# EAGLE board manvnode2 (EAGLE 5.09)
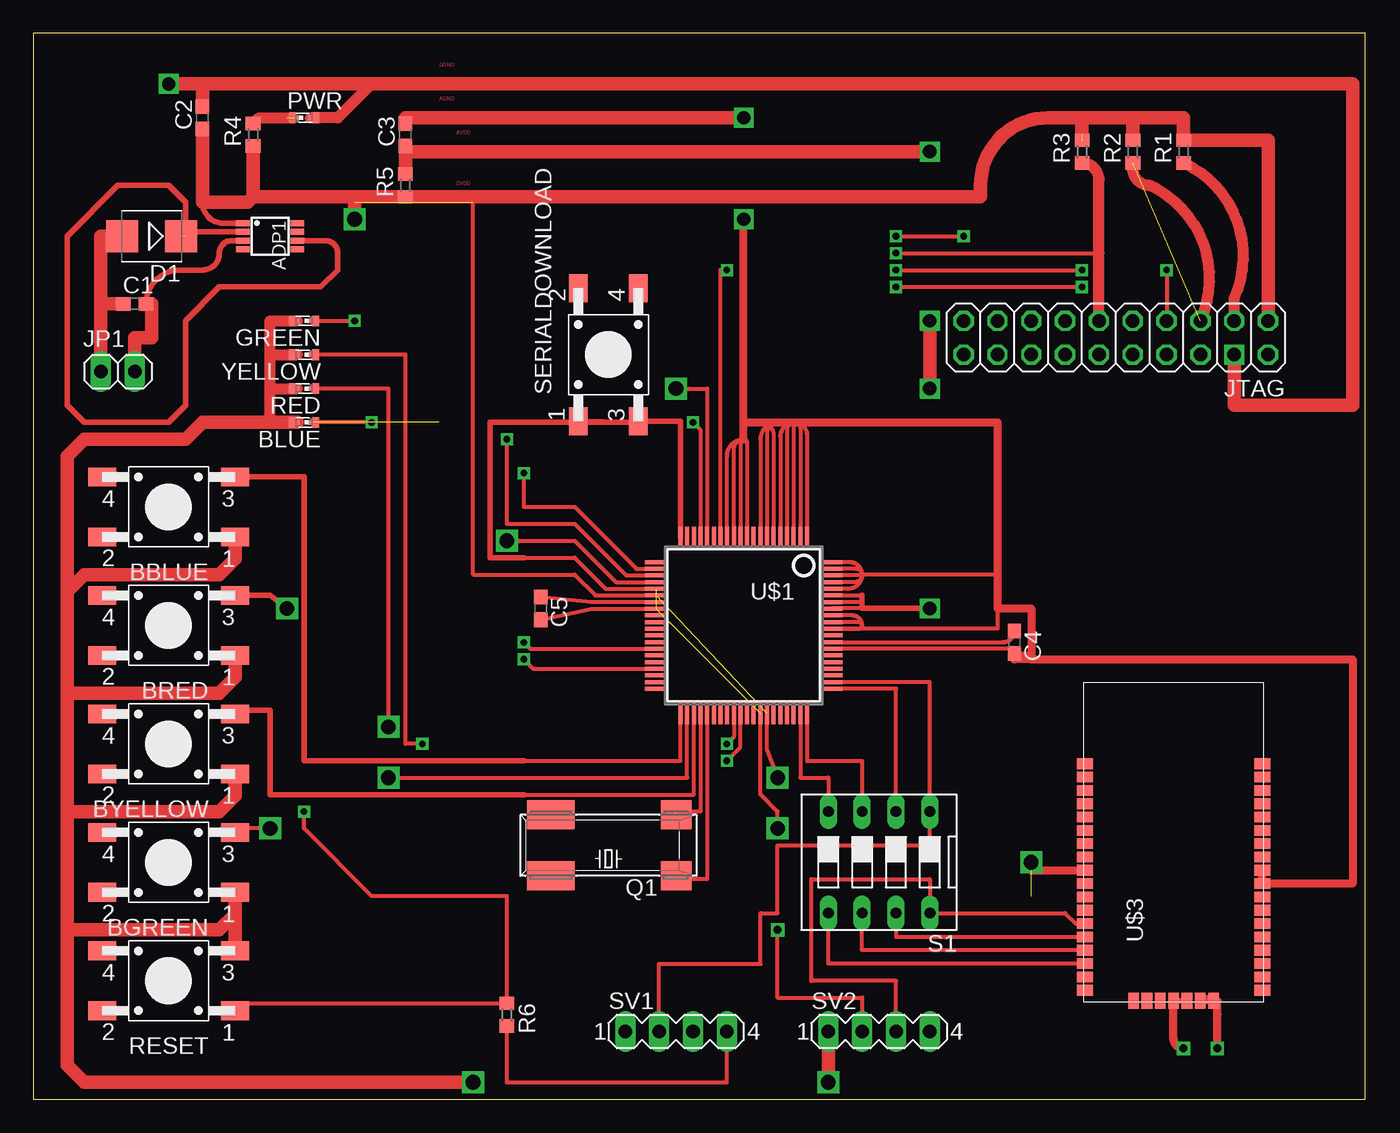
[diagram p0: board, top side]
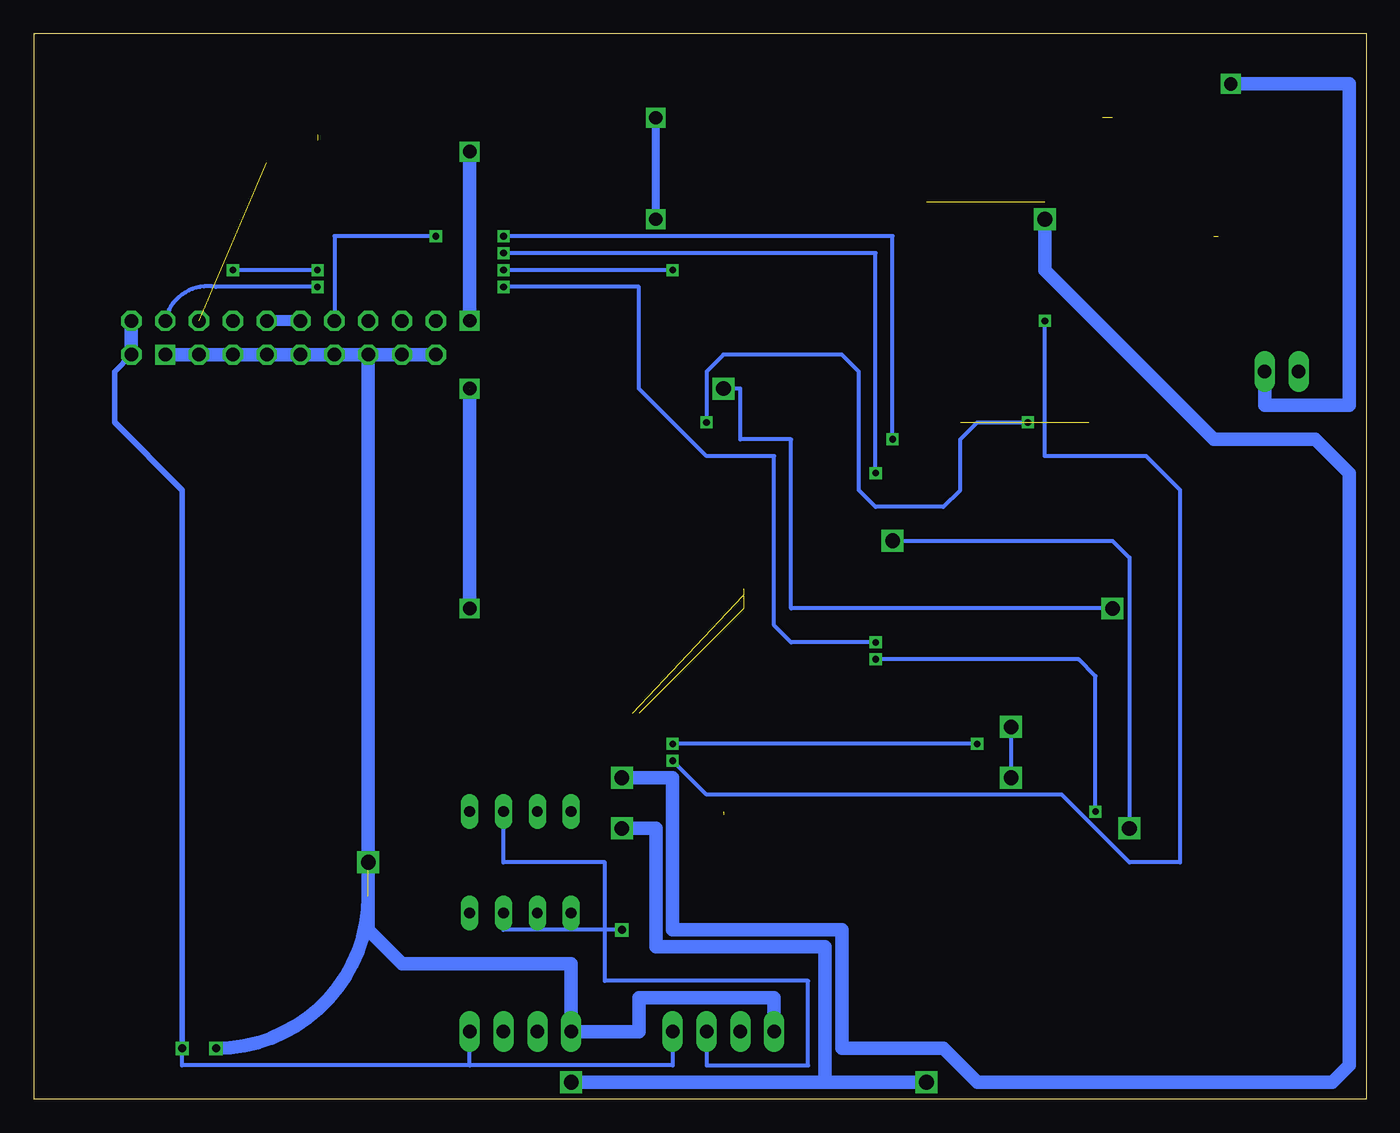
[diagram p1: board, bottom side, seen from below]

Size 100 x 80 mm. Coordinates in mm from the lower left corner, seen from the top.
Outline: 0,0 100,0 100,80 0,80 0,0
Copper layers (1*16): Top 0.035mm / dielectric 1.5mm / Bottom 0.035mm
Design rules "default": minimum track width 10mil, minimum drill 24mil, track to track 8mil, track to pad 8mil, pad to pad 8mil, via to via 8mil, smd to smd 8mil, copper to edge 40mil, drill to drill 8mil, minimum pad ring 10mil, minimum via ring 8mil, stop-mask expansion 4mil, vias tented up to drill 0mil, thermal gap 10mil

## Footprints (pad centres in the part's own frame; a part is rotated, then mirrored left to right if it is on the bottom)
MSOP8 = smd 0.45 x 1: 1 -0.975,-2.05; 2 -0.325,-2.05; 3 0.325,-2.05; 4 0.975,-2.05; 5 0.975,2.05; 6 0.325,2.05; 7 -0.325,2.05; 8 -0.975,2.05
TASTER-9314_SMD = smd 2.1 x 1.4: 1 -5,2.25; 2 5,2.25; 3 -5,-2.25; 4 5,-2.25
SMARTLED-TTW = smd 0.8 x 0.5: A 0,-0.875; C 0,0.875 | smd 0.35 x 0.35: A@1 0,-0.5; C@1 0,0.5
C0603 = smd 1.1 x 1: 1 -0.85,0; 2 0.85,0
SMB = smd 2.4 x 2.4: A 2.2,0; C -2.2,0
1X02 = drill 1.016 long: 1 -1.27,0; 2 1.27,0
2X10 = drill 1.016 octagon: 1 -11.43,-1.27; 2 -11.43,1.27; 3 -8.89,-1.27; 4 -8.89,1.27; 5 -6.35,-1.27; 6 -6.35,1.27; 7 -3.81,-1.27; 8 -3.81,1.27; 9 -1.27,-1.27; 10 -1.27,1.27; 11 1.27,-1.27; 12 1.27,1.27; 13 3.81,-1.27; 14 3.81,1.27; 15 6.35,-1.27; 16 6.35,1.27; 17 8.89,-1.27; 18 8.89,1.27; 19 11.43,-1.27; 20 11.43,1.27
86SMX = smd 2.286 x 2.184: 1 -5.08,-2.286; 4 -5.08,2.286 | smd 3.556 x 2.184: 2 4.318,-2.286; 3 4.318,2.286
R0603 = smd 1 x 1.1: 1 -0.85,0; 2 0.85,0
DS-04 = drill 0.813 long: 1 -3.81,-3.81; 2 -1.27,-3.81; 3 1.27,-3.81; 4 3.81,-3.81; 5 3.81,3.81; 6 1.27,3.81; 7 -1.27,3.81; 8 -3.81,3.81
MA04-1 = drill 1.016 long: 1 -3.81,0; 2 -1.27,0; 3 1.27,0; 4 3.81,0
SQFP-S-12X12-80 = smd 0.3 x 1.6: 1 -4.75,-6.6; 2 -4.25,-6.6; 3 -3.75,-6.6; 4 -3.25,-6.6; 5 -2.75,-6.6; 6 -2.25,-6.6; 7 -1.75,-6.6; 8 -1.25,-6.6; 9 -0.75,-6.6; 10 -0.25,-6.6; 11 0.25,-6.6; 12 0.75,-6.6; 13 1.25,-6.6; 14 1.75,-6.6; 15 2.25,-6.6; 16 2.75,-6.6; 17 3.25,-6.6; 18 3.75,-6.6; 19 4.25,-6.6; 20 4.75,-6.6; 41 4.75,6.6; 42 4.25,6.6; 43 3.75,6.6; 44 3.25,6.6; 45 2.75,6.6; 46 2.25,6.6; 47 1.75,6.6; 48 1.25,6.6; 49 0.75,6.6; 50 0.25,6.6; 51 -0.25,6.6; 52 -0.75,6.6; 53 -1.25,6.6; 54 -1.75,6.6; 55 -2.25,6.6; 56 -2.75,6.6; 57 -3.25,6.6; 58 -3.75,6.6; 59 -4.25,6.6; 60 -4.75,6.6 | smd 1.6 x 0.3: 21 6.6,-4.75; 22 6.6,-4.25; 23 6.6,-3.75; 24 6.6,-3.25; 25 6.6,-2.75; 26 6.6,-2.25; 27 6.6,-1.75; 28 6.6,-1.25; 29 6.6,-0.75; 30 6.6,-0.25; 31 6.6,0.25; 32 6.6,0.75; 33 6.6,1.25; 34 6.6,1.75; 35 6.6,2.25; 36 6.6,2.75; 37 6.6,3.25; 38 6.6,3.75; 39 6.6,4.25; 40 6.6,4.75; 61 -6.6,4.75; 62 -6.6,4.25; 63 -6.6,3.75; 64 -6.6,3.25; 65 -6.6,2.75; 66 -6.6,2.25; 67 -6.6,1.75; 68 -6.6,1.25; 69 -6.6,0.75; 70 -6.6,0.25; 71 -6.6,-0.25; 72 -6.6,-0.75; 73 -6.6,-1.25; 74 -6.6,-1.75; 75 -6.6,-2.25; 76 -6.6,-2.75; 77 -6.6,-3.25; 78 -6.6,-3.75; 79 -6.6,-4.25; 80 -6.6,-4.75
ZIGBITA2 = smd 0.8 x 1.2: 1 7.4,7.4; 2 6.4,7.4; 3 5.4,7.4; 4 4.4,7.4; 5 3.4,7.4; 6 2.4,7.4; 7 1.4,7.4; 8 0.4,7.4; 9 -0.6,7.4; 10 -1.6,7.4; 11 -2.6,7.4; 12 -3.6,7.4; 13 -4.6,7.4; 14 -5.6,7.4; 15 -6.6,7.4; 16 -7.6,7.4; 17 -8.6,7.4; 18 -9.6,7.4; 26 -9.6,-5.9; 27 -8.6,-5.9; 28 -7.6,-5.9; 29 -6.6,-5.9; 30 -5.6,-5.9; 31 -4.6,-5.9; 32 -3.6,-5.9; 33 -2.6,-5.9; 34 -1.6,-5.9; 35 -0.6,-5.9; 36 0.4,-5.9; 37 1.4,-5.9; 38 2.4,-5.9; 39 3.4,-5.9; 40 4.4,-5.9; 41 5.4,-5.9; 42 6.4,-5.9; 43 7.4,-5.9 | smd 1.2 x 0.8: 19 -10.4,3.75; 20 -10.4,2.75; 21 -10.4,1.75; 22 -10.4,0.75; 23 -10.4,-0.25; 24 -10.4,-1.25; 25 -10.4,-2.25

## Placement (x,y rotation side)
ADP1  ADP3333  [MSOP8]  17.78,64.77 270 top
BBLUE  [TASTER-9314_SMD]  10.16,44.45 180 top
BGREEN  [TASTER-9314_SMD]  10.16,17.78 180 top
BLUE  [SMARTLED-TTW]  20.32,50.8 90 top
BRED  [TASTER-9314_SMD]  10.16,35.56 180 top
BYELLOW  [TASTER-9314_SMD]  10.16,26.67 180 top
C1  0.1µF  [C0603]  7.62,59.69 0 top
C2  10µF  [C0603]  12.7,73.66 90 top
C3  10µF  [C0603]  27.94,72.39 90 top
C4  0.47µF  [C0603]  73.66,34.29 270 top
C5  0.47µF  [C0603]  38.1,36.83 270 top
D1  ES2D  [SMB]  8.89,64.77 180 top
GREEN  [SMARTLED-TTW]  20.32,58.42 90 top
JP1  [1X02]  6.35,54.61 0 top
JTAG  [2X10]  81.28,57.15 180 top
PWR  [SMARTLED-TTW]  20.32,73.66 270 top
Q1  32,768kHz  [86SMX]  43.18,19.05 180 top
R1  100k  [R0603]  86.36,71.12 90 top
R2  100k  [R0603]  82.55,71.12 90 top
R3  100k  [R0603]  78.74,71.12 90 top
R4  100  [R0603]  16.51,72.39 90 top
R5  100  [R0603]  27.94,68.58 90 top
R6  1k  [R0603]  35.56,6.35 270 top
RED  [SMARTLED-TTW]  20.32,53.34 90 top
RESET  [TASTER-9314_SMD]  10.16,8.89 180 top
S1  [DS-04]  63.5,17.78 180 top
SERIALDOWNLOAD  [TASTER-9314_SMD]  43.18,55.88 90 top
SV1  [MA04-1]  48.26,5.08 0 top
SV2  [MA04-1]  63.5,5.08 0 top
U$1  ADUC7026  [SQFP-S-12X12-80]  53.34,35.56 180 top
U$3  ZDM-A1281-A2  [ZIGBITA2]  86.36,17.78 90 top
YELLOW  [SMARTLED-TTW]  20.32,55.88 90 top

## Library data of the parts
ADP1 = marcel
BBLUE BGREEN BRED BYELLOW RESET SERIALDOWNLOAD = Ergaenzung
BLUE GREEN PWR RED YELLOW = led
C1-C5 R1-R6 = resistor
D1 = diode
JP1 JTAG = pinhead
Q1 = crystal
S1 = switch-dil
SV1 SV2 = con-lstb
U$1 = aduc-arm7
U$3 = atmel

## Nets
AGND: C3.2 C4.2 U$1.1 U$1.2 U$1.3 U$1.4 U$1.5 U$1.6 U$1.7 U$1.8 U$1.10 U$1.11 U$1.12 U$1.13 U$1.67 U$1.70 U$1.71 U$1.72 U$1.76 U$1.77 U$1.78 U$1.79 U$1.80 U$3.34 U$3.35
DGND: BBLUE.1 BGREEN.1 BLUE.C@1 BRED.1 BYELLOW.1 C5.2 GREEN.C@1 PWR.C@1 RED.C@1 RESET.3 SERIALDOWNLOAD.1 SV1.1 SV2.1 U$1.25 U$1.28 U$1.53 U$3.9 U$3.22 U$3.23 YELLOW.C@1
N$2: C1.1 D1.A JP1.1
N$5: S1.4 U$1.59
N$6: S1.3 U$1.60
N$7: PWR.A@1 R4.2
N$8: S1.2 SV1.3 U$1.61
N$9: S1.1 SV1.2 U$1.62
N$10: R6.1 RESET.1 U$1.37
N$11: Q1.1 U$1.44
N$12: RED.A@1 U$1.42
N$13: Q1.4 U$1.45
N$14: SERIALDOWNLOAD.3 U$1.20
N$15: C4.1 U$1.68
N$16: C5.1 U$1.27
N$18: BRED.3 U$1.16
N$19: BYELLOW.3 U$1.43
N$20: BGREEN.3 U$1.24
N$21: BLUE.A@1 U$1.17
N$22: GREEN.A@1 U$1.50
N$23: U$1.49 YELLOW.A@1
N$24: BBLUE.3 U$1.41
N$25: ADP1.2 ADP1.6 D1.C
N$27: ADP1.3 C1.2 C2.2 JP1.2 JTAG.4 JTAG.6 JTAG.8 JTAG.10 JTAG.12 JTAG.14 JTAG.16 JTAG.18 JTAG.20
TCK: JTAG.9 JTAG.11 R3.1 U$1.22
TDI: JTAG.5 R2.1 U$1.15
TDO: JTAG.13 U$1.23
TMS: JTAG.7 U$1.14
TRST: JTAG.3 R1.1 U$1.34
UART_CTS: S1.5 U$3.16
UART_RTS: S1.6 U$3.15
UART_RXD: S1.7 SV2.2 U$3.14
UART_TXD: S1.8 SV2.3 U$3.13
VCC: C3.1 R5.2 U$1.73 U$1.74 U$1.75
VDD: ADP1.1 C2.1 JTAG.1 JTAG.2 R1.2 R2.2 R3.2 R4.1 R5.1 R6.2 SV1.4 SV2.4 U$1.26 U$1.54 U$3.24 U$3.25

## Tracks (layer width: path | path; a pad name or v marks a point on that pad's centre or on a via)
AGND  (via drill 1)
  Top 0.305: U$1.67 73.29,33.81 arc-90 C4.2 74.93,33.44 74.93,36.83 | 60.02,40.31 U$1.80 61.29,40.31 arc-90 62.23,39.37 | 60.52,39.81 U$1.79 61.79,39.81 arc-90 62.23,39.37 | U$1.70 60.71,35.31 | U$1.76 61.17,38.31 arc90 62.23,39.37 | U$1.77 61.67,38.81 arc90 62.23,39.37 | U$1.78 62.17,39.31 arc90 62.23,39.37 | U$1.70 61.98,35.31 arc90 62.23,35.56 | U$1.72 61.48,36.31 arc-90 62.23,35.56 | U$1.71 61.98,35.81 arc-90 62.23,35.56 | U$1.70 72.39,35.31 72.39,36.83 | 72.39,39.37 62.23,39.37 | U$1.11 53.09,49.28 arc-90 53.34,49.53 | U$1.10 53.59,49.28 arc90 53.34,49.53 | U$1.1 58.09,49.86 arc90 57.15,50.8 | U$1.2 57.59,50.36 arc90 57.15,50.8 | U$1.3 57.09,50.74 arc-90 57.15,50.8 | U$1.4 56.59,50.24 arc-90 57.15,50.8 | U$1.5 56.09,49.74 arc-90 57.15,50.8 | U$1.6 55.59,49.82 arc90 54.61,50.8 | U$1.8 54.59,49.51 arc-90 55.88,50.8 arc90 55.09,50.01 U$1.7 | U$1.12 52.59,48.78 arc-90 53.34,49.53 | U$1.13 52.09,48.28 arc-90 53.34,49.53
  Top 0.61: 74.93,33.02 73.66,33.02 | 74.93,33.02 74.93,36.83 72.39,36.83 72.39,39.37 72.39,50.8 57.15,50.8 55.88,50.8 54.61,50.8 53.34,50.8 | 53.34,49.53 53.34,50.8 | 53.34,50.8 v53.34,66.04 | U$3.35 U$3.34 99.06,16.18 99.06,33.02 74.93,33.02
  Top 1.016: C3.2 27.94,73.66 v53.34,73.66
  Bottom 0.61: v53.34,66.04 v53.34,73.66
DGND  (via drill 0.6, 1.1)  (3 unrouted)
  Top 0.305: U$1.28 41.91,36.81 C5.2 | U$1.25 42.97,38.31 40.64,40.64 36.83,40.64 | U$1.53 54.59,22.88 55.88,21.59 v55.88,20.32
  Top 0.406: SERIALDOWNLOAD.1 44.74,50.8 34.29,50.8 34.29,40.64 36.83,40.64 | U$3.22 U$3.23
  Top 0.61: U$3.22 85.61,4.56 arc90 v86.36,3.81 | U$3.9 74.93,17.18 74.93,17.78
  Top 0.813: BLUE.C@1 17.78,50.8 17.78,53.34 | 17.78,53.34 RED.C@1 | 17.78,53.34 17.78,55.88 | 17.78,55.88 YELLOW.C@1 | 17.78,55.88 17.78,58.42 GREEN.C@1 | PWR.C@1 22.86,73.66 25.4,76.2
  Top 1.016: BBLUE.1 15.16,40.56 13.97,39.37 3.81,39.37 2.54,38.1 | 2.54,12.7 2.54,2.54 3.81,1.27 v33.02,1.27 | 2.54,12.7 2.54,21.59 | 2.54,21.59 2.54,30.48 | 2.54,30.48 2.54,38.1 | BRED.1 15.16,31.67 13.97,30.48 2.54,30.48 | BYELLOW.1 15.16,22.78 13.97,21.59 2.54,21.59 | 15.16,13.89 BGREEN.1 | 15.16,13.89 13.97,12.7 2.54,12.7 | 15.16,13.89 RESET.3 | v59.69,1.27 SV2.1 | BLUE.C@1 12.7,50.8 11.43,49.53 3.81,49.53 2.54,48.26 2.54,38.1 | v90.17,55.88 90.17,52.07 99.06,52.07 99.06,76.2 25.4,76.2
  Bottom 1.016: v33.02,1.27 40.64,1.27 | 40.64,1.27 v59.69,1.27 | SV1.1 44.45,7.62 54.61,7.62 54.61,5.08 SV2.1 59.69,10.16 72.39,10.16 74.93,12.7 74.93,15.24 | 40.64,1.27 40.64,11.43 53.34,11.43 53.34,20.32 v55.88,20.32 | 74.93,15.24 arc90 v86.36,3.81 | 74.93,15.24 74.93,55.88 | 74.93,55.88 69.85,55.88 | 74.93,55.88 v90.17,55.88
N$2
  Top 1.016: JP1.1 5.08,59.69 | 5.08,59.69 5.08,64.77 D1.A | 5.08,59.69 C1.1
N$4  (1 unrouted)
N$5
  Top 0.305: U$1.59 57.59,24.13 59.69,24.13 S1.4
N$6
  Top 0.305: U$1.60 58.09,25.4 62.23,25.4 S1.3
N$7  (1 unrouted)
  Top 0.813: R4.2 16.93,73.66 19.05,73.66
N$8
  Top 0.305: U$1.61 64.77,30.81 S1.2
  Bottom 0.305: SV1.3 49.53,2.54 41.91,2.54 41.91,8.89 57.15,8.89 57.15,17.78 64.77,17.78 S1.2
N$9
  Top 0.305: U$1.62 67.31,31.31 S1.1 67.31,19.05 55.88,19.05 55.88,13.97 54.61,13.97 54.61,10.16 46.99,10.16 SV1.2
N$10  (via drill 0.5)
  Top 0.305: U$1.37 37.54,32.31 v36.83,33.02 | RESET.1 15.16,7.2 R6.1 35.56,15.24 25.4,15.24 20.32,20.32 v20.32,21.59
  Bottom 0.305: v36.83,33.02 21.59,33.02 20.32,31.75 v20.32,21.59
N$11  (1 unrouted)
  Top 0.305: U$1.44 50.09,21.59 48.26,21.59
N$12  (via drill 1.1)
  Top 0.305: U$1.42 49.09,24.13 v26.67,24.13 | RED.A@1 26.67,53.34 v26.67,27.94
  Bottom 0.305: v26.67,27.94 v26.67,24.13
N$13
  Top 0.305: U$1.45 50.59,16.51 48.26,16.51 Q1.4
N$14
  Top 0.406: U$1.20 48.59,50.88 SERIALDOWNLOAD.3
N$15
  Top 0.305: U$1.68 72.83,34.31 arc90 C4.1
N$16
  Top 0.305: U$1.27 41.91,37.31 C5.1
N$17  (1 unrouted)
N$18  (via drill 1.1)
  Top 0.305: U$1.16 50.59,53.34 v48.26,53.34
  Top 0.406: BRED.3 17.78,37.81 v19.05,36.83
  Bottom 0.305: v19.05,36.83 43.18,36.83 43.18,49.53 46.99,49.53 46.99,53.34 v48.26,53.34
N$19
  Top 0.305: U$1.43 49.59,22.86 36.83,22.86
  Top 0.406: 36.83,22.86 17.78,22.86 17.78,29.21 15.16,29.21 BYELLOW.3
N$20  (via drill 1.1)
  Top 0.305: U$1.24 43.74,38.81 40.64,41.91 v35.56,41.91 | v17.78,20.32 15.45,20.32 BGREEN.3
  Bottom 0.305: v35.56,41.91 19.05,41.91 17.78,40.64 v17.78,20.32
N$21  (via drill 0.5)  (3 unrouted)
  Top 0.305: U$1.17 50.09,50.24 v49.53,50.8 | v25.4,50.8 BLUE.A@1
  Bottom 0.305: v49.53,50.8 49.53,54.61 48.26,55.88 39.37,55.88 38.1,54.61 38.1,45.72 36.83,44.45 31.75,44.45 30.48,45.72 30.48,49.53 29.21,50.8 v25.4,50.8
N$22  (via drill 0.5)
  Top 0.305: U$1.50 53.09,26.42 v52.07,25.4 | GREEN.A@1 v24.13,58.42
  Bottom 0.305: v52.07,25.4 49.53,22.86 22.86,22.86 17.78,17.78 13.97,17.78 13.97,45.72 16.51,48.26 24.13,48.26 v24.13,58.42
N$23  (via drill 0.5)  (1 unrouted)
  Top 0.305: YELLOW.A@1 27.94,55.88 27.94,26.67 v29.21,26.67 | U$1.49 52.59,27.19 52.07,26.67
  Bottom 0.305: v29.21,26.67 52.07,26.67
N$24
  Top 0.305: U$1.41 48.59,25.4 36.83,25.4
  Top 0.406: BBLUE.3 20.32,46.7 20.32,25.4 36.83,25.4
N$25  (1 unrouted)
  Top 0.406: 11.43,65.09 ADP1.2 | 11.43,65.09 11.43,64.77 D1.C | ADP1.6 21.91,64.44 arc-90 22.86,63.5 22.86,62.23 21.59,60.96 13.97,60.96 11.43,58.42 11.43,52.07 10.16,50.8 3.81,50.8 2.54,52.07 2.54,64.77 6.35,68.58 10.16,68.58 11.43,67.31 11.43,65.09
N$26  (via drill 0.6)
  other vias: 88.9,3.81
N$27  (via drill 1)
  Top 0.406: C1.2 arc-90 11.01,62.23 12.7,62.23 arc90 13.97,63.5 arc-90 14.91,64.44 ADP1.3
  Top 1.016: JP1.2 7.62,57.15 8.89,57.15 8.89,59.69 C1.2 | C2.2 12.7,76.2 v10.16,76.2 99.06,76.2 99.06,52.07 90.17,52.07 JTAG.4
  Bottom 0.813: JTAG.20 JTAG.18 JTAG.16 JTAG.14 JTAG.12 JTAG.10 JTAG.8 JTAG.6 JTAG.4
  Bottom 1.016: v10.16,76.2 1.27,76.2 1.27,52.07 7.62,52.07 JP1.2 | JTAG.4 JTAG.16 JTAG.20
  other vias: 90.17,55.88
N$28  (via drill 1.1)
  Top 1.016: v24.13,66.04 24.13,67.31
  Bottom 1.016: v24.13,66.04 24.13,62.23 11.43,49.53 3.81,49.53 1.27,46.99 1.27,2.54 2.54,1.27 29.21,1.27 31.75,3.81 39.37,3.81 39.37,12.7 52.07,12.7 52.07,24.13 v55.88,24.13
N$29  (via drill 0.6)
  other vias: 55.88,12.7
N$38  (via drill 1.1)
  other vias: 35.56,41.91
N$39  (via drill 1.1)
  other vias: 17.78,20.32
N$40  (via drill 1.1)
  other vias: 26.67,24.13
N$42  (via drill 0.5)
  other vias: 52.07,26.67
N$43  (via drill 0.5)
  other vias: 20.32,21.59
N$44  (via drill 0.5)
  other vias: 35.56,49.53
N$45  (via drill 0.5)
  other vias: 36.83,46.99
N$46  (via drill 0.5)
  other vias: 69.85,64.77
N$47  (via drill 1.1)
  other vias: 74.93,17.78
N$48  (via drill 0.5)
  other vias: 25.4,50.8
N$49  (via drill 0.6)
  other vias: 86.36,3.81
TCK  (via drill 0.5)
  Top 0.305: U$1.22 45.28,39.81 40.64,44.45 36.83,44.45 v36.83,46.99 | v64.77,63.5 80.01,63.5
  Top 0.813: R3.1 arc-90 80.01,69 80.01,63.5 JTAG.11
  Bottom 0.305: v36.83,46.99 36.83,63.5 v64.77,63.5
  Bottom 0.813: JTAG.11 JTAG.9
TDI  (1 unrouted)
  Top 0.813: JTAG.5 arc90 83.82,68.58 arc-90 82.55,69.85 R2.1
TDO  (via drill 0.5)
  Top 0.305: U$1.23 44.51,39.31 40.64,43.18 35.56,43.18 v35.56,49.53 | v64.77,64.77 v69.85,64.77
  Bottom 0.305: v35.56,49.53 35.56,64.77 v64.77,64.77 | v69.85,64.77 77.47,64.77 JTAG.13
TMS  (via drill 0.5)
  Top 0.305: U$1.14 51.59,62.23 v52.07,62.23 | v64.77,62.23 v78.74,62.23 | v85.09,62.23 JTAG.7
  Bottom 0.305: v52.07,62.23 v64.77,62.23 | v78.74,62.23 v85.09,62.23
TRST  (via drill 0.5)
  Top 0.305: U$1.34 37.31,33.81 v36.83,34.29 | v64.77,60.96 v78.74,60.96
  Top 0.813: JTAG.3 90.17,60.11 arc90 R1.1
  Bottom 0.305: v78.74,60.96 86.36,60.96 arc-90 JTAG.3 | v36.83,34.29 43.18,34.29 44.45,35.56 44.45,48.26 49.53,48.26 54.61,53.34 54.61,60.96 v64.77,60.96
UART_CTS
  Top 0.305: U$3.16 59.69,10.18 S1.5
UART_RTS
  Top 0.305: U$3.15 62.23,11.18 S1.6
UART_RXD  (via drill 0.6)
  Top 0.305: U$3.14 64.77,12.18 S1.7 | SV2.2 62.23,7.62 55.88,7.62 v55.88,12.7
  Bottom 0.305: v55.88,12.7 64.77,12.7 S1.7
UART_TXD
  Top 0.305: U$3.13 78.26,13.18 77.47,13.97 S1.8 67.31,16.51 58.42,16.51 58.42,8.89 64.77,8.89 SV2.3
VCC  (via drill 1)
  Top 0.305: U$1.75 62.23,37.81 62.23,37.31 | 62.23,37.31 62.23,36.83 59.94,36.83 U$1.73 | 62.23,37.31 U$1.74
  Top 0.406: 67.02,36.83 v67.31,36.83 62.23,36.83 62.23,37.81
  Top 1.016: R5.2 27.94,71.12 | 27.94,71.12 C3.1 | 27.94,71.12 v67.31,71.12 | v67.31,58.42 v67.31,53.34
  Bottom 1.016: v67.31,71.12 v67.31,58.42 | v67.31,53.34 v67.31,36.83
VDD  (via drill 0.6)  (3 unrouted)
  Top 0.305: U$1.26 42.2,37.81 40.64,39.37 33.02,39.37 33.02,67.31 | SV1.4 52.07,1.27 35.56,1.27 R6.2 | U$1.54 55.09,26.19 55.88,24.13
  Top 0.406: ADP1.1 14.27,65.75 arc-90 12.7,67.31 | U$3.25 88.61,7.62 87.63,7.62 87.63,7.38 U$3.24 87.87,7.38 arc-90 88.9,6.35
  Top 0.61: U$3.25 88.9,7.38 88.9,6.35 v88.9,3.81
  Top 1.016: C2.1 12.7,67.31 16.09,67.31 16.51,67.73 | R5.1 16.51,67.73 | 78.74,73.66 78.74,72.39 | 82.55,73.66 78.74,73.66 | 82.55,73.66 R2.2 | 82.55,73.66 86.36,73.66 R1.2 92.71,71.97 JTAG.1 | 78.74,73.66 76.2,73.66 arc90 71.12,68.58 71.12,67.73 R5.1 | 16.51,67.73 R4.1 | R5.1 24.13,67.73 24.13,67.31
  Bottom 0.305: 67.31,2.54 SV2.4 | 67.31,2.54 88.9,2.54 v88.9,3.81 | SV1.4 52.07,2.54 67.31,2.54
  Bottom 0.406: v88.9,3.81 88.9,45.72 93.98,50.8 93.98,54.61 JTAG.2
  Bottom 1.016: JTAG.2 JTAG.1

## Text on the board
Top: DGND | AGND | AVDD | DVDD